# Altium PCB MS1005-DEMO-V2.PcbDoc
Units mil, origin at the board's own origin, x right, y up, seen from the top; angles counter-clockwise.
Board outline 2160 x 2405 mil, 2 copper layers (Top Layer, Bottom Layer); 54 components, 64 nets, 220 pads, 100 vias.
Unrouted connection lines stored in the file: 2.
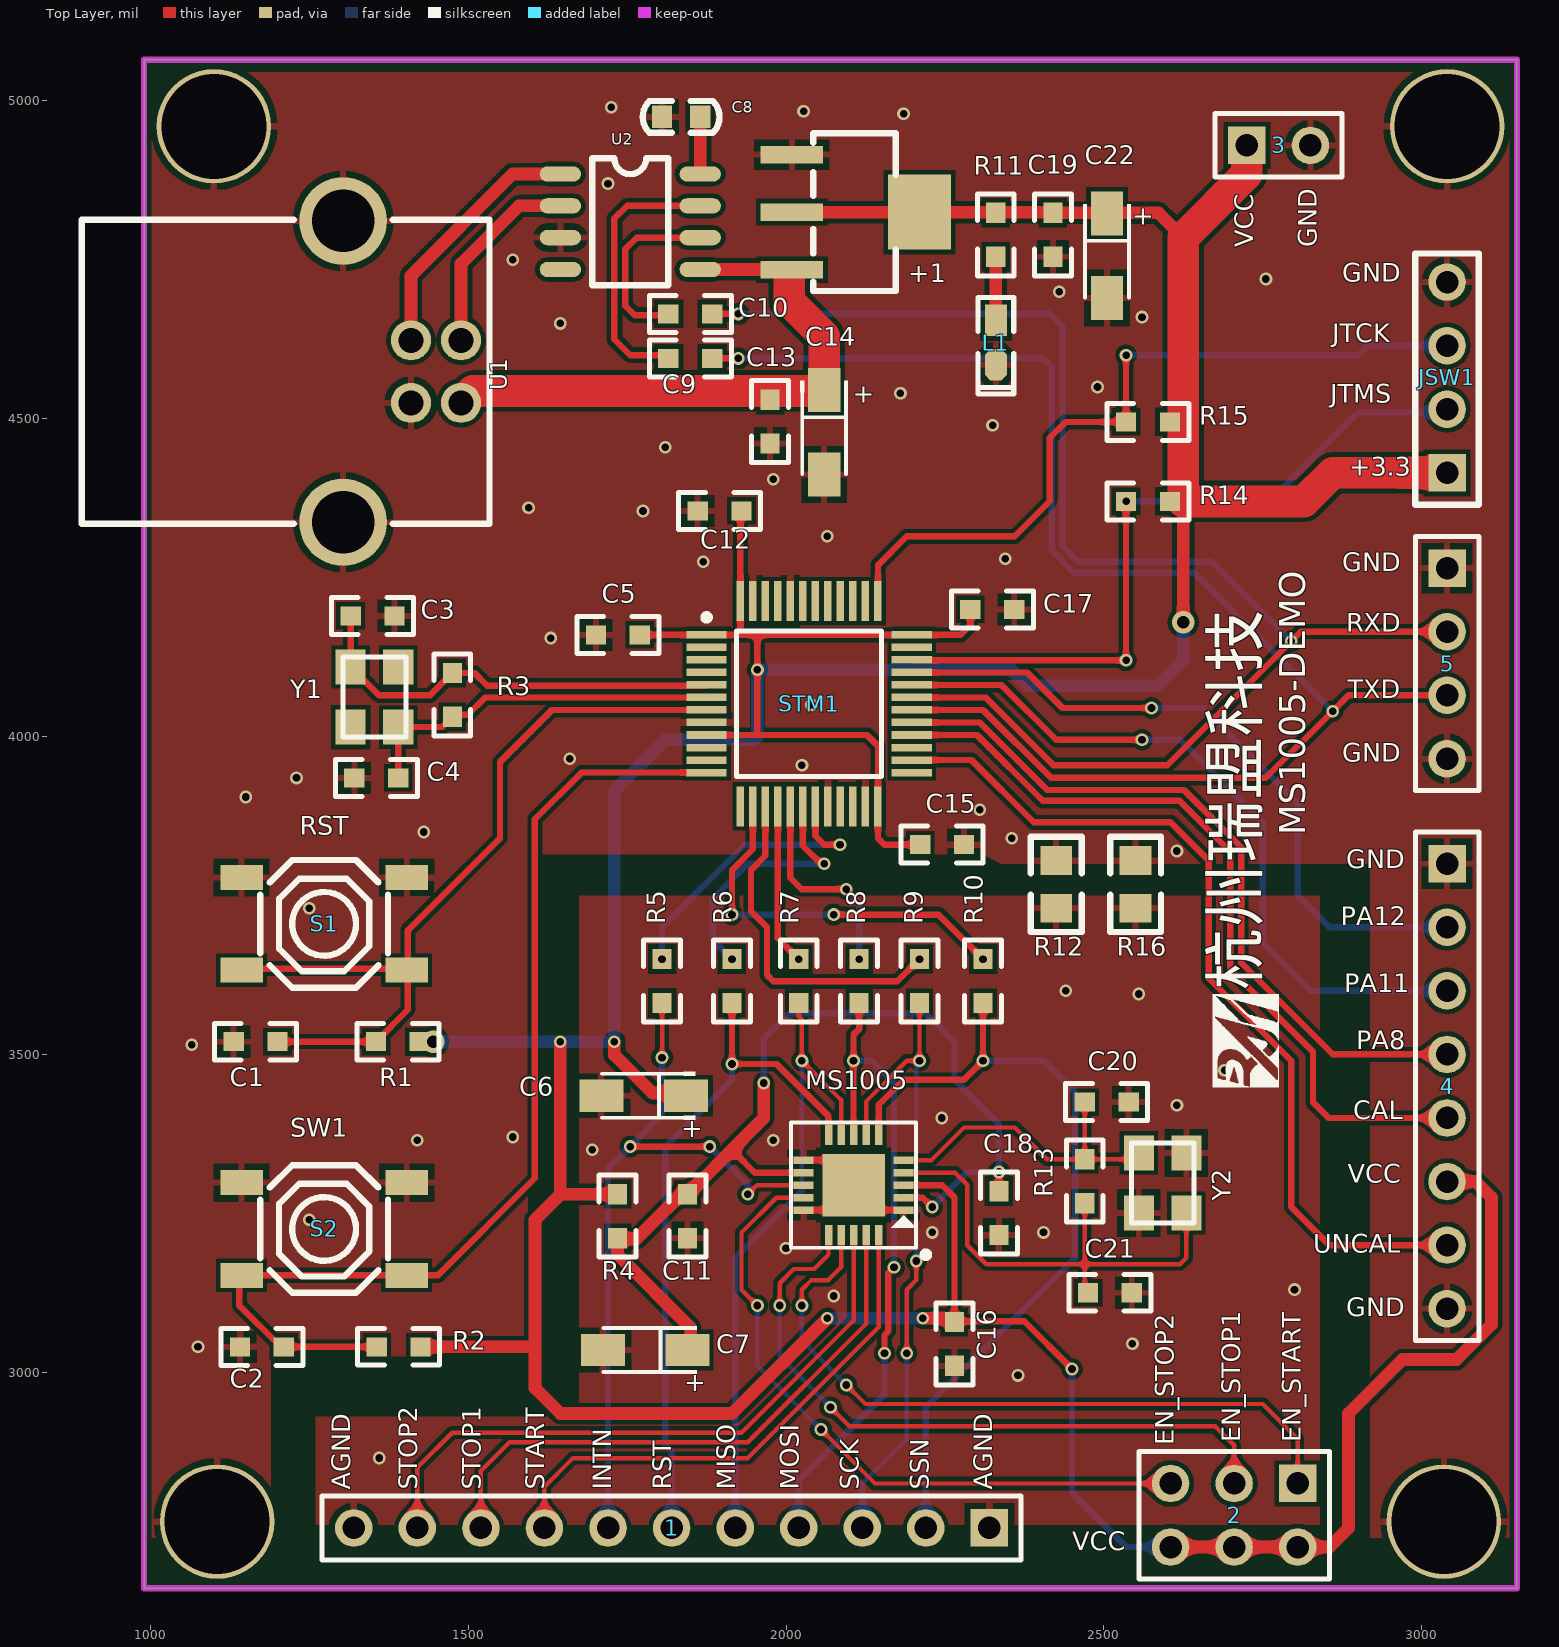
[diagram p0: Top Layer view]
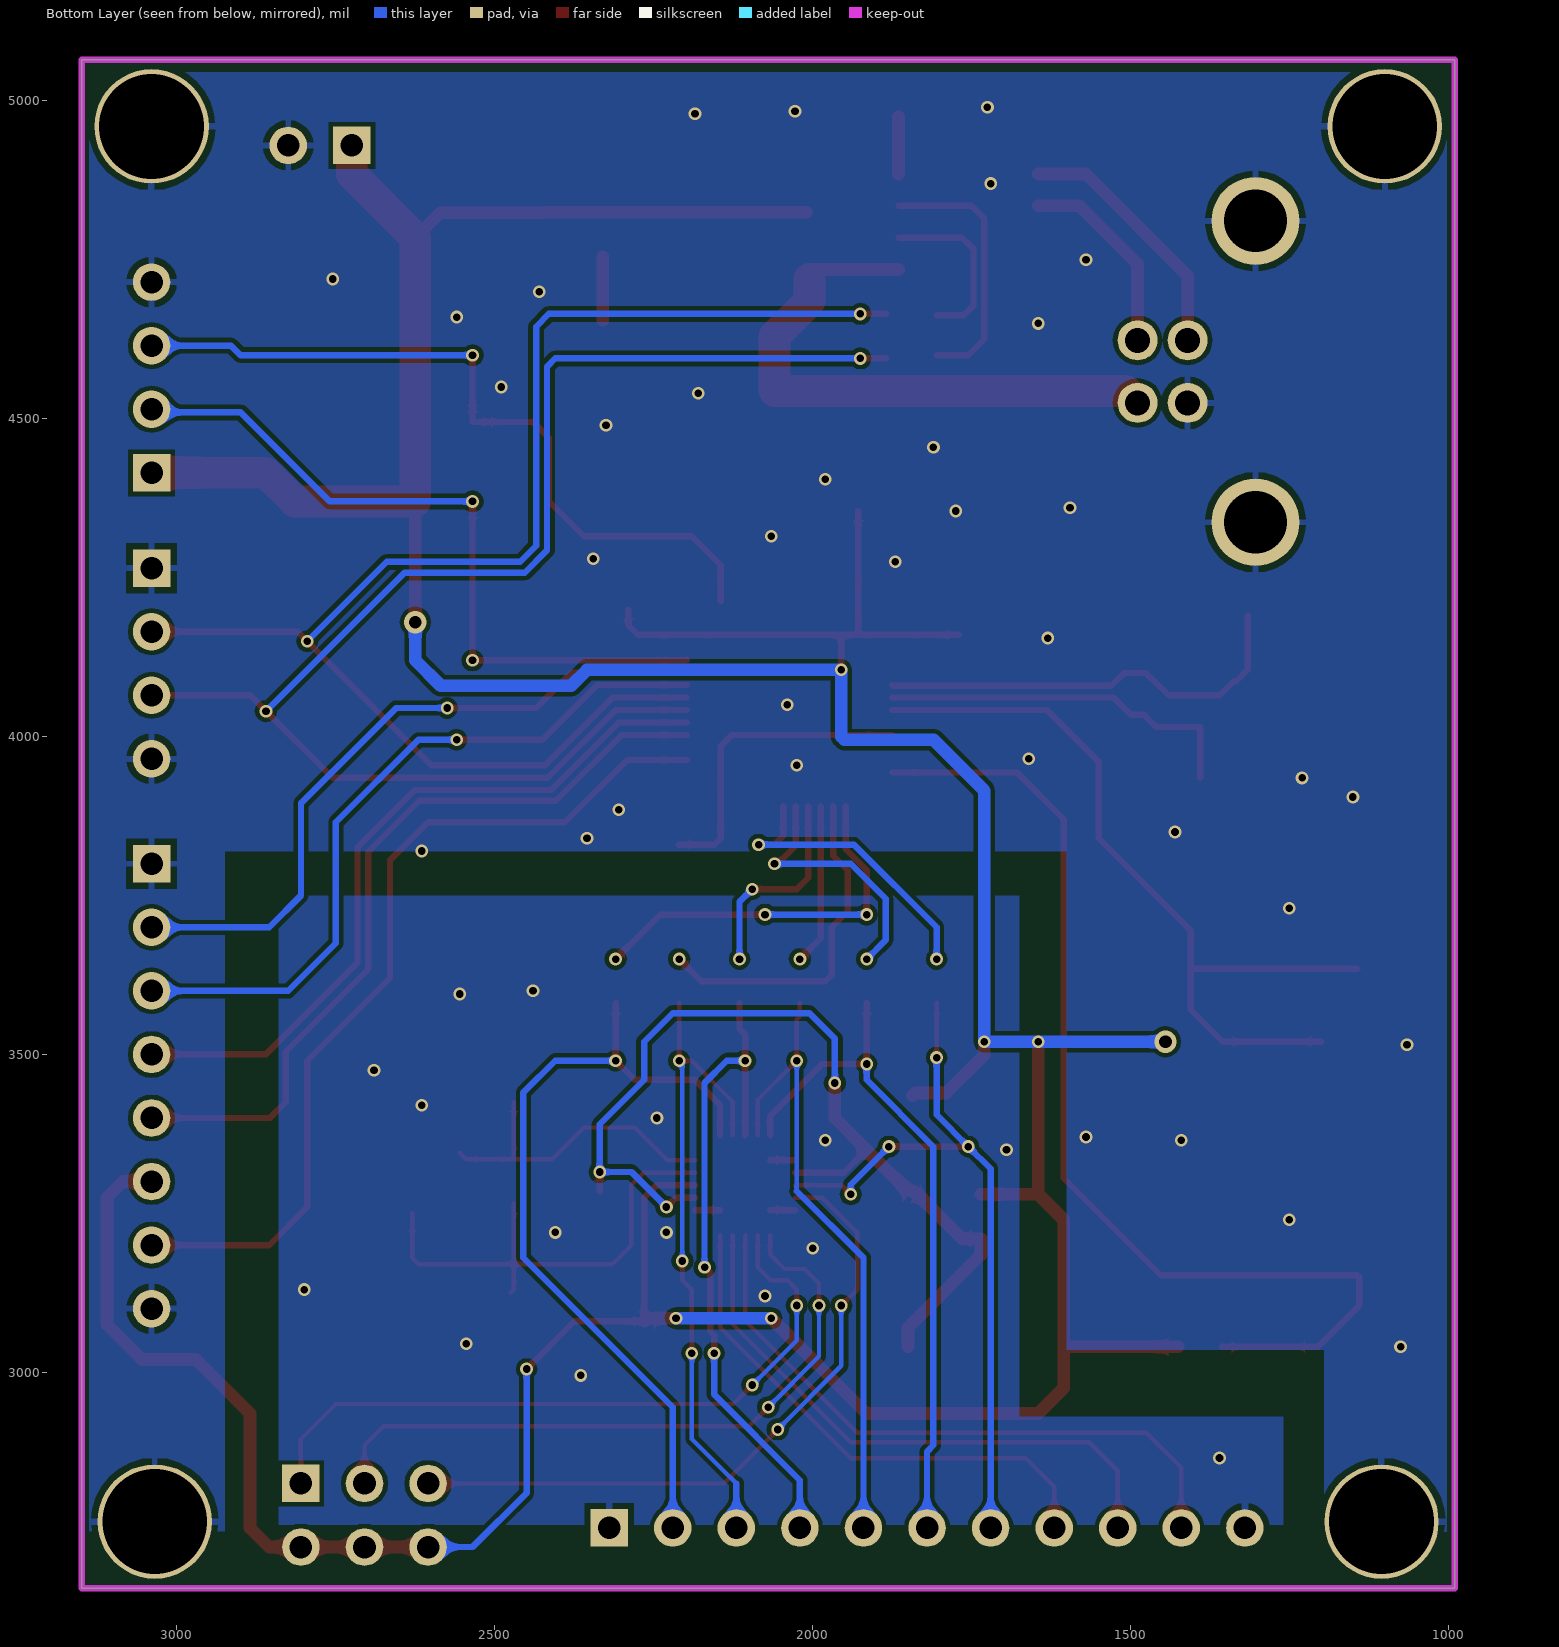
[diagram p1: Bottom Layer view, seen from below]

## Layer stack, top to bottom
Top Solder: solder mask 0.4, Solder Resist, Dk 3.5
Top Layer: signal copper 1.4
Dielectric1: dielectric 12.6, FR-4, Dk 4.8
Bottom Layer: signal copper 1.4
Bottom Solder: solder mask 0.4, Solder Resist, Dk 3.5

## Board outline
990,2660 990,5065 3150,5065 3150,2660

## Design rules (kind name [scope] priority, off if disabled: settings)
Clearance [All] p1: gap=7 ignorepadtopadclearanceinfootprint=FALSE except(0: Arc-Hole Track-Hole SMDPad-Hole THPad-Hole Via-Hole Fill-Hole Poly-Hole Region-Hole Text-Hole)
ComponentClearance [All] p1 off: gap=10 collisioncheckmode=3 verticalgap=10 showdistances=FALSE
HoleSize [All] p1: absolutevalues=TRUE maxlimit=200 minlimit=1 maxpercent=80.000 minpercent=20.000
HoleToHoleClearance [All] p1: gap=5 allowstackedmicrovias=TRUE
MinimumSolderMaskSliver [All] p1: minsoldermaskwidth=0
PlaneConnect [All] p1: pad.planeconnectstyle=Relief pad.reliefexpansion=20 pad.reliefentries=4 pad.reliefconductorwidth=10 pad.reliefairgap=10 via.planeconnectstyle=Direct via.reliefexpansion=20 via.reliefentries=4 via.reliefconductorwidth=10 via.reliefairgap=10
PolygonConnect [All] p1: thpad.connectstyle=Relief thpad.reliefconductorwidth=10 thpad.reliefentries=4 thpad.polygonreliefangle="90 Angle" thpad.airgapwidth=10 smdpad.connectstyle=Relief smdpad.reliefconductorwidth=10 smdpad.reliefentries=4 smdpad.polygonreliefangle="90 Angle" smdpad.airgapwidth=10 via.connectstyle=Direct via.reliefconductorwidth=10 via.reliefentries=4 via.polygonreliefangle="90 Angle" via.airgapwidth=10
RoutingVias [All] p1: holewidth=12 width=20 viastyle="Through Hole" minholewidth=12 minwidth=20 maxholewidth=28 maxwidth=50
SilkToSilkClearance [All] p1: silktosilkclearance=0
SilkToSolderMaskClearance [IsPad] p1: minsilkscreentomaskgap=0 clearancetoexposedcopper=TRUE
SolderMaskExpansion [All] p1: expansion=4
Width [All] p1: maxlimit=50 minlimit=5 preferedwidth=10
23 further rules are at their usual default settings.

## Classes and differential pairs
component class MS1003-DEMO: +1 C1 C3 C4 C5 C12 C13 C14 C16 C17 C19 C20 C21 C22 JSW1 L1 R2 R5 R6 R7 R8 R9 R11 R12 R13 R14 R15 R16 Y1

## Components (designator, comment, footprint, x,y, rotation, side; value= is the part's Value field where it differs from the comment)
1 "NC" HDR1X11 2320,2755 r180 top (schematic designator P10)
2 "NC" HDR2X3 2805,2825 r180 top (schematic designator P7)
3 "NC" HDR1X2 2725,4930 r0 top
4 "NC" HDR1X8 3040,3800 r270 top (schematic designator P5)
5 "NC" HDR1X4 3040,4265 r270 top (schematic designator P4)
+1 "ASM1117-3.3" 1117 1767,6404.55 r270 top (schematic designator U8)
C1 "104" R0603 1200,3520 r180 top (schematic designator C3)
C2 "104" R0603 1210,3039.88 r180 top (schematic designator C20)
C3 "20P" R0603 1384,4190 r180 top (schematic designator C19)
C4 "20P" R0603 1321,3935 r0 top (schematic designator C18)
C5 "104" R0603 1770,4160 r180 top (schematic designator C6)
C6 "C11366" 3216 1955.21,3472.64 r180 top (schematic designator C11)
C7 "C11366" 3216 1957.43,3072.64 r180 top (schematic designator C12)
C8 "0.1" 0603C 1805,4975 r0 top
C9 "0R" R0603 1884,4595 r180 top (schematic designator C38)
C10 "0R" R0603 1884,4665 r180 top (schematic designator C38)
C11 "104" R0603 1845,3280 r270 top (schematic designator C15)
C12 "104" R0603 1930,4355 r180 top (schematic designator C4)
C13 "104" R0603 1975,4461 r90 top (schematic designator C38)
C14 "C11366" 3216 2022.36,4657.43 r270 top (schematic designator C36)
C15 "104" R0603 2280,3830 r180 top (schematic designator C5)
C16 "104" R0603 2265,3010 r90 top (schematic designator C8)
C17 "104" R0603 2359,4200 r180 top (schematic designator C2)
C18 "104" R0603 2335,3216 r90 top (schematic designator C9)
C19 "104" R0603 2420,4755 r90 top (schematic designator C39)
C20 "15p" R0603 2539,3425 r180 top (schematic designator C7)
C21 "15p" R0603 2544,3125 r180 top (schematic designator C10)
C22 "C11366" 3216 2467.36,4935.21 r270 top (schematic designator C37)
JSW1 "NC" 4HEARD 3105,4815 r90 top
L1 "LED" "LED 0603R" 2330,4620 r270 top (schematic designator D2)
MS1005 "MS1005" QFN20-4X4 2185,3255 r180 top (schematic designator U1)
R1 "10K" R0603 1355,3520 r0 top (schematic designator R11)
R2 "4K7" R0603 1425,3040 r180 top (schematic designator R21)
R3 "1M" R0603 1475,4100 r270 top (schematic designator R4)
R4 "0" R0603 1735,3280 r270 top (schematic designator R1)
R5 "0" R0603 1805,3650 r270 top (schematic designator R39)
R6 "0" R0603 1915,3650 r270 top (schematic designator R38)
R7 "0" R0603 2020,3650 r270 top (schematic designator R37)
R8 "0" R0603 2115,3650 r270 top (schematic designator R36)
R9 "0" R0603 2210,3650 r270 top (schematic designator R35)
R10 "0" R0603 2310,3650 r270 top (schematic designator R34)
R11 "1K" R0603 2330,4824 r270 top (schematic designator R97)
R12 "0R" R0805 2425,3805 r270 top (schematic designator R27)
R13 "560k" R0603 2470,3335 r270 top (schematic designator R3)
R14 "10K" R0603 2535,4370 r0 top (schematic designator R10)
R15 "10K" R0603 2535,4495 r0 top (schematic designator R20)
R16 "0R" R0805 2550,3805 r270 top (schematic designator R28)
S1 "SW-SMD_4P-L5.1-W5.1-P3.70-LS6.5-TL-2" SW-SMD_4P-L5.1-W5.1-P3.70-LS6.5-TL-2 1273.38,3705.4 r0 top
S2 "SW-SMD_4P-L5.1-W5.1-P3.70-LS6.5-TL-2" SW-SMD_4P-L5.1-W5.1-P3.70-LS6.5-TL-2 1273.38,3225.4 r0 top
STM1 "STM32F103C8T6" LQFP48 1875,4160 r0 top (schematic designator U3)
U1 "USB-B-TH_USB-B10-BRW" USB-B-TH_USB-B10-BRW 1396.02,4574.21 r270 top
U2 "CH340N" SOP8-200 1645,4885 r0 top
Y1 "8M" 4M 1390,4015 r0 top (schematic designator CY1)
Y2 "8M" 4M 2629.8,3250.51 r0 top (schematic designator Y1)

## Footprints (in the part's own frame and the unit in brackets; to place one, negate y for a bottom-side part, rotate by r counter-clockwise, add the part's x,y. Pads: shape width x height; smd on the part's side, far side on the other; paste and mask are expansions set on the pad)
4HEARD [mm]
  rect 1.5x1.5 hole 0.9: 1(-10.16,1.651)
  round 1.5 hole 0.9: 2(-7.62,1.651) 3(-5.08,1.651) 4(-2.54,1.651)
  silkscreen extent -11.43,0.38 -1.4,2.92
4M [mm]
  rect 1.2x1.4 smd: 1(0,0) 2(0,2.4) 3(-1.9,2.4) 4(-1.9,0)
  silkscreen extent -2.2,-0.4 0.3,2.8
0603C [mil]
  rect 32x35 smd: 1(0,0) 2(60,0)
  silkscreen extent -30,-25 90,25
1117 [mm]
  rect 0.7x2.5 smd: 1(37.821,6.152) 2(40.121,6.152) 3(42.421,6.152)
  rect 3x2.5 smd: 2(40.121,11.252)
  silkscreen extent 36.97,7 43.27,10.3
3216 [mil]
  rect 69.19x51.02 smd paste+0 mask+2: 1(112.43,37.64) 2(245.21,37.64)
  silkscreen extent 98,0 245,75
HDR1X2 [mm] "Connector; Header; 2 Position"
  rect 1.5x1.5 hole 0.9: 1(0,0)
  round 1.5 hole 0.9: 2(2.54,0)
  silkscreen extent -1.27,-1.27 3.81,1.27
HDR1X4 [mm] "Connector; Header; 4 Position"
  rect 1.5x1.5 hole 0.9: 1(0,0)
  round 1.5 hole 0.9: 2(2.54,0) 3(5.08,0) 4(7.62,0)
  silkscreen extent -1.27,-1.27 8.89,1.27
HDR1X8 [mm] "Connector; Header; 8 Position"
  rect 1.5x1.5 hole 0.9: 1(0,0)
  round 1.5 hole 0.9: 2(2.54,0) 3(5.08,0) 4(7.62,0) 5(10.16,0) 6(12.7,0) 7(15.24,0) 8(17.78,0)
  silkscreen extent -1.27,-1.27 19.05,1.27
HDR1X11 [mm] "Connector; Header; 11 Position"
  rect 1.5x1.5 hole 0.9: 1(0,0)
  round 1.5 hole 0.9: 2(2.54,0) 3(5.08,0) 4(7.62,0) 5(10.16,0) 6(12.7,0) 7(15.24,0) 8(17.78,0) 9(20.32,0) 10(22.86,0) 11(25.4,0)
  silkscreen extent -1.27,-1.27 26.67,1.27
HDR2X3 [mm] "Connector; Header; 3x2 Position"
  rect 1.5x1.5 hole 0.9: 1(0,0)
  round 1.5 hole 0.9: 2(0,2.54) 3(2.54,0) 4(2.54,2.54) 5(5.08,0) 6(5.08,2.54)
  silkscreen extent -1.27,-1.27 6.35,3.81
"LED 0603R" [mil] "红色0603LED"
  rect 50x35 smd: 1(-35,0.26)
  oct 50x35 smd: 2(35,0.26)
  silkscreen extent -71,-28 81,28, body extent -31,-16 31,16, height 18
LQFP48 [mm]
  rect 1.6x0.3 smd: 1(0,0) 2(0,-0.5) 3(0,-1) 4(0,-1.5) 5(0,-2) 6(0,-2.5) 7(0,-3) 8(0,-3.5) 9(0,-4) 10(0,-4.5) 11(0,-5) 12(0,-5.5) 25(8.2,-5.5) 26(8.2,-5) 27(8.2,-4.5) 28(8.2,-4) 29(8.2,-3.5) 30(8.2,-3) 31(8.2,-2.5) 32(8.2,-2) 33(8.2,-1.5) 34(8.2,-1) 35(8.2,-0.5) 36(8.2,0)
  rect 0.3x1.6 smd: 13(1.35,-6.85) 14(1.85,-6.85) 15(2.35,-6.85) 16(2.85,-6.85) 17(3.35,-6.85) 18(3.85,-6.85) 19(4.35,-6.85) 20(4.85,-6.85) 21(5.35,-6.85) 22(5.85,-6.85) 23(6.35,-6.85) 24(6.85,-6.85) 37(6.85,1.35) 38(6.35,1.35) 39(5.85,1.35) 40(5.35,1.35) 41(4.85,1.35) 42(4.35,1.35) 43(3.85,1.35) 44(3.35,1.35) 45(2.85,1.35) 46(2.35,1.35) 47(1.85,1.35) 48(1.35,1.35)
  silkscreen extent -0.12,-5.65 7,0.82
QFN20-4X4 [mm]
  rect 2.5x2.5 smd mask+0: 0(2,-1)
  rect 0.8x0.3 smd mask+0: 1(0,0) 2(0,-0.5) 3(0,-1) 4(0,-1.5) 5(0,-2) 11(4,-2) 12(4,-1.5) 13(4,-1) 14(4,-0.5) 15(4,0)
  rect 0.3x0.8 smd mask+0: 6(1,-3) 7(1.5,-3) 8(2,-3) 9(2.5,-3) 10(3,-3) 16(3,1) 17(2.5,1) 18(2,1) 19(1.5,1) 20(1,1)
  silkscreen extent -0.5,-3.5 4.5,1.5
R0603 [mil]
  rect 32x30 smd mask+4: 1(0,0) 2(69,0)
  silkscreen extent -30,-29 99,29
R0805 [mil]
  rect 45x50 smd mask+4: 1(0,0)
  rect 45x50 smd: 2(75,0)
  silkscreen extent -38,-40 113,40
SOP8-200 [mil]
  oval 65x24 smd: 1(0,0) 2(0,-50) 3(0,-100) 4(0,-150) 5(220,-150) 6(220,-100) 7(220,-50) 8(220,0)
  silkscreen extent 50,-175 170,25
SW-SMD_4P-L5.1-W5.1-P3.70-LS6.5-TL-2 [mm]
  rect 1.7x1 smd paste+0 mask+0.051: 1(-3.3,1.85) 2(3.3,1.85) 3(-3.3,-1.85) 4(3.3,-1.85)
  silkscreen extent -2.55,-2.55 2.55,2.55
USB-B-TH_USB-B10-BRW [mm]
  round 1.6 hole 1: 1(1.25,2.355) 2(-1.25,2.355) 3(-1.25,0.355) 4(1.25,0.355)
  round 3.5 hole 2.5: 5(-6.02,-2.355) 6(6.02,-2.355)
  silkscreen extent -6.08,-12.81 6.07,3.49

## Part data
1: library part "Header 11"
2: library part "Header 3X2"
4: library part "Header 8"
5: library part "Header 4"
+1: library part REG1117-3.3, "800mA and 1A Low Dropout Positive Regulator 2.85V, 3.3V, 5V, and Adjustable"
C1 C2 C3 C4 C5 C12 C15 C17: library part C_1
C6 C7: library part Cap
C9 C10 C11 C13 C16 C18 C19 C20 C21: library part Cap, "Capacitor"
C14 C22: library part "Cap Pol2"
JSW1: library part SW_LINK
MS1005: library part AD7689
R1 R2 R3 R14 R15: library part R
R4 R5 R6 R7 R8 R9 R10 R13: library part Res2, "Resistor"
R11 R12 R16: library part RES2
Y1: library part CRYSTAL
Y2: library part XTAL, "Crystal Oscillator"

## Free pads (board coordinates)
  round 180 hole 165: 56(1100,4960) 56(1105,2765) 56(3035,2765) 56(3040,4960)

## Via types
v1: diameter 20, hole 12, Top Layer to Bottom Layer, 98 vias
v2: diameter 35, hole 20, Top Layer to Bottom Layer, 2 vias

## Nets (pads, with @x,y where several pads share a name; then routed paths per layer and width w, separated by ;. In a path a pad name is that pad's centre, name@x,y a point inside that pad or via, vN(x,y) a via of type N, cw(c..) or ccw(c..) an arc to the next point about the centre after c; other vN are vias at no path point)
11111: 
+3.3: 2.2 2.4 2.6 3.1 4.6 +1.2 C5.1 C6.1 C12.1 C15.2 C16.2 C17.2 C19.2 C22.1 JSW1.1 MS1005.3 R1.2 R2.1 R4.1 R11.1 R14.2 R15.2 STM1.1 STM1.9 STM1.24 STM1.36 STM1.48 | length 8702
  Top Layer w10: C5.1 STM1.1 1921.58,4160 ; STM1.9 1957.48,4002.52 ; C12.1@1928.15,4355 STM1.48 1928.15,4166.57 1921.58,4160 ; MS1005.3 2245.63,3294.37 2265,3275 2265,3080 2375,3080 v1(2450,3005) ; C15.2 2155,3830 2144.69,3840.31 STM1.24 2144.69,3985.31 2127.48,4002.52 1957.48,4002.52 ; C17.2 2290,4175 2275,4160 STM1.36 1955,4160 ; 1921.58,4160 1955,4160 ; 1955,4160 v1(1955,4105) 1955,4005 1957.48,4002.52
  Top Layer w20: R2.1 1600,3040 1605,3045 ; 1645,3285 v1(1645,3520) ; v1(1730,3520) 1730,3499.15 1789.9,3439.25 1838.53,3439.25 C6.1 ; R4.1 1645,3280 1605,3240 1605,3045 ; +1.2@2009.21,4825 2210,4825 2419,4825 C19.2 2586,4824 2625,4785 ; v1(2065,3085) 1915,2935 1645,2935 1605,2975 1605,3045 ; v1(2215,3085) 2260,3085 C16.2@2265,3080 ; 2.6 2.4 2.2 2855,2725 2885,2755 2885,2935 2970,3020 3055,3020 3110,3075 3110,3275 3085,3300 4.6 ; v2(2625,4180) 2625,4370
  Top Layer w50: 3.1 2725,4885 2625,4785 2625,4370 2815,4370 2860,4415 JSW1.1
  Bottom Layer w10: v1(2450,3005) 2450,2810 2535,2725 2.6
  Bottom Layer w20: v2(1445,3520) v1(1645,3520) v1(1730,3520) 1730,3915 1810,3995 1950,3995 ; 1955,4000 v1(1955,4105) 2355,4105 2380,4080 2585,4080 2625,4120 v2(2625,4180) ; v1(2065,3085) v1(2215,3085)
+5: +1.3 C13.2 C14.1 U1.1 U2.5 | length 922.2
  Top Layer w20: U2.5 2008.66,4735 +1.3
  Top Layer w50: U1.1 1507.52,4543.78 2059.49,4543.78 2060,4544.29 C14.1 2060,4630 2005,4685 2005,4720
AGND: 1.1 1.11 C6.2 C7.2 C11.2 C16.1 C18.1 C20.1 C21.1 MS1005.0 MS1005.1 MS1005.11 MS1005.15 R12.2 R16.2 Y2.2 Y2.4 | length 118.1
  Top Layer w10: MS1005.15 MS1005.0@2066.89,3255 ; MS1005.11 MS1005.0@2066.89,3333.74 ; MS1005.0@2145.63,3255 MS1005.1
  other v1: 1360,2865 2365,2995 2545,3045 2075,3120 2800,3130 2000,3195 2230,3220 2405,3220 1695,3350 1980,3365 2245,3400 2615,3420 2690,3475 2555,3595 2440,3600
DM: U1.2 U2.2 | length 314.4
  Top Layer w20: U1.2 1488.74,4743.74 1580,4835 U2.2
DP: U1.3 U2.1 | length 402.8
  Top Layer w20: U1.3 1410,4725 1570,4885 U2.1
EN_START: 2.1 MS1005.17 | length 1120.9
  Top Layer w7: v1(2025,3105) 2025,3130 2040,3145 2066.57,3145 2086.57,3165 MS1005.17 ; v1(2095,2980) 2125,2950 2750,2950 2805,2895 2.1
  Bottom Layer w7: v1(2025,3105) 2025,3050 v1(2095,2980)
EN_STOP1: 2.3 MS1005.16 | length 1074.1
  Top Layer w7: v1(1990,3105) 1990,3140 2012.38,3162.38 2044.27,3162.38 2066.89,3185 MS1005.16 ; v1(2070,2945) 2100,2915 2675,2915 2705,2885 2.3
  Bottom Layer w7: v1(1990,3105) 1990,3025 v1(2070,2945)
EN_STOP2: 2.5 MS1005.14 | length 1067.2
  Top Layer w7: v1(1955,3105) 1930,3130 1930,3220 1984.68,3274.68 MS1005.14 ; v1(2055,2910) 2140,2825 2.5
  Bottom Layer w7: v1(1955,3105) 1955,3010 v1(2055,2910)
GND: 3.2 4.1 4.8 5.1 5.4 +1.1 C1.2 C2.2 C3.1 C4.1 C5.2 C8.1 C12.2 C13.1 C14.2 C15.1 C17.1 C19.1 C22.2 JSW1.4 L1.2 pad.56 R12.1 R16.1 S1.1 S1.2 S2.1 S2.2 STM1.8 STM1.20 STM1.23 STM1.44 STM1.47 U1.4 U1.5 U1.6 U2.3
  other v1: 1075,3040 1250,3240 1420,3365 1570,3370 1065,3515 1250,3730 2615,3820 2355,3840 1430,3850 2305,3885 1150,3905 1230,3935 2025,3955 1660,3965 2040,4050 1630,4155 1870,4275 2345,4280 2065,4315 1775,4355 1595,4360 1980,4405 1810,4455 2325,4490 2180,4540 2490,4550 1645,4650 2560,4660 2430,4700 2755,4720 1570,4750 1720,4870 2185,4980 2027.68,4984.02 1725,4990
JTCK: JSW1.3 R15.1 STM1.37 | length 1215
  Top Layer w10: STM1.37 2144.69,4269.69 2190,4315 2360,4315 2415,4370 2415,4470 2440,4495 R15.1 v1(2535,4600)
  Bottom Layer w10: v1(2535,4600) 2900,4600 2915,4615 JSW1.3
JTDI: STM1.38
JTDO: STM1.39
JTMS: JSW1.2 R14.1 STM1.34 | length 1152.5
  Top Layer w10: STM1.34 2198.47,4120 v1(2535,4120) v1(2535,4370)
  Bottom Layer w10: v1(2535,4370) 2760,4370 2900,4510 3035,4510 JSW1.2
MS1003-INTN: R5.1 STM1.19 | length 474.9
  Top Layer w10: STM1.19 2046.26,3843.74 2060,3830 v1(2085,3830)
  Bottom Layer w10: v1(1805,3650) 1805,3700 1935,3830 v1(2085,3830)
MS1003-MISO: R7.1 STM1.16 | length 253.9
  Top Layer w10: STM1.16 1987.21,3682.79 v1(2020,3650)
MS1003-MOSI: R8.1 STM1.17 | length 326.1
  Top Layer w10: STM1.17 2006.89,3778.11 2025,3760 v1(2095,3760)
  Bottom Layer w10: v1(2095,3760) 2115,3740 v1(2115,3650)
MS1003-RST: R6.1 STM1.18 | length 415.2
  Top Layer w7: STM1.18@2024.5,3888.24 STM1.18 ; v1@2055,3800 v1(2060,3800)
  Top Layer w10: STM1.18 2026.58,3828.42 v1@2055,3800
  Bottom Layer w10: v1(1915,3650) 1885,3680 1885,3745 1940,3800 v1(2060,3800)
MS1003-SCK: R9.1 STM1.15 | length 543.6
  Top Layer w10: STM1.15 1967.52,3812.52 1945,3790 1945,3725 1970,3700 1970,3625 1980,3615 2175,3615 v1(2210,3650)
MS1003-SSN: R10.1 STM1.14 | length 607.9
  Top Layer w10: v1(1915,3720) 1915,3790 1947.84,3822.84 STM1.14 ; v1(2075,3720) 2240,3720 v1(2310,3650)
  Bottom Layer w10: v1(1915,3720) v1(2075,3720)
MS1003-START: 1.8 MS1005.20 | length 839.4
  Top Layer w7: 1.8 1620,2820 1665,2865 1940,2865 2145.63,3070.63 MS1005.20
MS1003-STOP1: 1.9 MS1005.19 | length 931.3
  Top Layer w7: 1.9 1520,2845 1565,2890 1940,2890 2125.94,3075.94 MS1005.19
MS1003-STOP2: 1.10 MS1005.18 | length 1011.4
  Top Layer w7: 1.10 1420,2850 1475,2905 1930,2905 2106.26,3081.26 MS1005.18
NetC7_2: C20.2 MS1005.5 R13.1 Y2.3 | length 506.1
  Top Layer w7: MS1005.5 2228.74,3333.74 2280,3385 2360,3385 2410,3335 R13.1 ; C20.2 R13.1 ; Y2.3 2545,3335 R13.1
NetC10_2: C21.2 MS1005.4 R13.2 Y2.1 | length 778
  Top Layer w7: MS1005.4 2265.94,3314.06 2285,3295 2285,3200 2315,3170 2470,3170 ; R13.2 2470,3170 ; C21.2 2470,3130 2470,3170 ; Y2.1 2629.8,3179.8 2620,3170 2470,3170
NetD10_1: L1.1 R11.2 | length 100.1
  Top Layer w20: R11.2 2330,4655.25 L1.1
NetR34_2: 1.2 MS1005.6 R10.2 | length 1279.7
  Top Layer w10: MS1005.6 2145.63,3420.63 2185,3460 2280,3460 v1(2310,3490) R10.2
  Bottom Layer w10: 1.2 2220,2945 2455,3180 2455,3440 2405,3490 v1(2310,3490)
NetR35_2: 1.3 MS1005.7 R9.2 | length 1052.7
  Top Layer w7: MS1005.7 2125.94,3425.94 2190,3490 v1(2210,3490) R9.2 2210,3555 ; v1(2190,3030) 2190,3130 2205,3145 v1(2205,3175)
  Bottom Layer w7: 2120,2825 2190,2895 v1(2190,3030) ; v1(2205,3175) 2205,3485 v1(2210,3490)
  Bottom Layer w10: 1.3 2120,2825
NetR36_2: 1.4 MS1005.8 R8.2 | length 1048.1
  Top Layer w10: MS1005.8 v1(2106.26,3490) 2106.26,3531.26 2115,3540 R8.2 ; v1(2155,3030) 2155,3058.08 2161.13,3064.21 2161.13,3156.13 v1(2170,3165)
  Bottom Layer w10: 1.4 2020,2830 2155,2965 v1(2155,3030) ; v1@2110,3490 2135,3490 2170,3455 v1(2170,3165)
NetR37_2: 1.5 MS1005.9 R7.2 | length 1014
  Top Layer w7: R7.2 2020,3560 2025,3555 v1(2025,3490) 2086.57,3428.43 MS1005.9
  Bottom Layer w7: 2025,3285 v1(2025,3490)
  Bottom Layer w10: 1.5 1920,3180 2025,3285
NetR38_2: 1.6 MS1005.10 R6.2 | length 1089.4
  Top Layer w10: R6.2 v1(1915,3485) 1985,3485 2066.89,3403.11 MS1005.10
  Bottom Layer w10: 1.6 1820,2875 1810,2885 1810,3355 1915,3460 v1(1915,3485)
NetR39_2: 1.7 MS1005.13 R5.2 | length 1179.5
  Top Layer w7: v1(1805,3495) R5.2 ; v1(1940,3280) 1954.37,3294.37 MS1005.13
  Top Layer w10: v1(1755,3355) v1(1880,3355)
  Bottom Layer w10: 1.7 1720,3320 v1(1755,3355) 1805,3405 v1(1805,3495) ; v1(1880,3355) 1940,3295 v1(1940,3280)
NetU7_8: C8.2 U2.8 | length 90
  Top Layer w20: U2.8 C8.2
NJTRST: STM1.40
NRST: C1.1 R1.1 S1.3 S1.4 STM1.7 | length 1293.8
  Top Layer w10: S1.3@1143.46,3635 1405,3635 1405,3695 1550,3840 1550,3960 1631.89,4041.89 STM1.7 ; C1.1 R1.1 1405,3570 S1.4@1405,3632.56
OSC_IN: C3.2 R3.1 STM1.5 Y1.3 | length 685
  Top Layer w10: C3.2 1315.2,4189.8 Y1.3 1315.2,4105.55 1333.82,4086.93 1337.76,4086.93 1359.68,4065 1440,4065 1464,4089 1465,4089 1475,4099 R3.1 1510,4100 1530,4080 1873.74,4080 STM1.5
OSC_OUT: C4.2 R3.2 STM1.6 Y1.1 | length 584.9
  Top Layer w10: C4.2 Y1.1 1459,4015 1464,4020 1465,4020 1475,4030 R3.2 1478.14,4034.14 1499.14,4034.14 1526.58,4061.58 STM1.6
PA0: STM1.10
PA1: STM1.11
PA2: C2.1 R2.2 S2.3 S2.4 STM1.12 | length 1678
  Top Layer w10: S2.3@1140,3150 1140,3105 1205,3040 R2.2 ; S2.3 S2.4 1452.56,3152.56 1605,3305 1605,3870 1678.47,3943.47 STM1.12
PA8: 4.4 STM1.29 | length 1165.2
  Top Layer w10: STM1.29 2304.92,4022.21 2411.12,3916 2626.12,3916 2716,3826.12 2716,3644 2860,3500 4.4
PA11: 4.3 STM1.32 | length 1152.8
  Top Layer w10: STM1.32 2338.74,4081.26 2425,3995 v1(2560,3995)
  Bottom Layer w10: v1(2560,3995) 2620,3995 2750,3865 2750,3675 2825,3600 4.3
PA12: 4.2 STM1.33 | length 1088.2
  Top Layer w10: STM1.33 2379.05,4100.95 2435,4045 v1@2570,4045
  Bottom Layer w10: v1(2575,4045) 2655,4045 2805,3895 2805,3750 2855,3700 4.2
PB0: STM1.13
PB5: STM1.41
PB6: STM1.42
PB7: STM1.43
PB8: STM1.45
PB9: STM1.46
PB10: STM1.21
PB11: STM1.22
PB12: STM1.25
PB13: 4.7 STM1.26 | length 1401.4
  Top Layer w10: STM1.26 2291.85,3963.15 2390,3865 2605,3865 2665,3805 2665,3620 2795,3490 2795,3260 2855,3200 4.7
PB14: STM1.27
PB15: 4.5 STM1.28 | length 1246.4
  Top Layer w10: STM1.28 2300.56,4002.52 2404.08,3899 2619.08,3899 2699,3819.08 2699,3634.08 2829,3504.08 2829,3425 2854,3400 4.5
PC13: STM1.2
PC14: STM1.3
PC15: STM1.4
UART_R2T: 
UART_T2R: 
USART1_RX: 5.2 C10.1 C10.2 STM1.31 U2.6 | length 2578.4
  Top Layer w10: C10.2@1805,4663 1762,4663 1747,4678 1747,4767 1765,4785 U2.6 ; C10.1 v1(1925,4665) ; STM1.31 2314.36,4061.58 2420.93,3955 2600,3955 2810,4165 5.2
  Bottom Layer w10: v1(1925,4665) 2415,4665 2435,4645 2435,4300 2460,4275 2670,4275 v1(2795,4150)
USART1_TX: 5.3 C9.1 C9.2 STM1.30 U2.7 | length 2734.1
  Top Layer w10: C9.2@1805,4600 1755,4600 1730,4625 1730,4815 1750,4835 U2.7 ; C9.1 v1(1925,4595) ; STM1.30 2310,4041.89 2416.89,3935 2755,3935 v1(2860,4040) 2885,4065 5.3
  Bottom Layer w10: v1(1925,4595) 2405,4595 2418,4582 2418,4292.96 2452.96,4258 2642,4258 v1(2860,4040)
V_USB: 
VDD: C7.1 C11.1 C18.2 MS1005.2 MS1005.12 R4.2 | length 1559.8
  Top Layer w10: 1915,3350 1950.94,3314.06 MS1005.12 ; MS1005.2 2215.32,3274.68 v1(2230,3260) ; C18.2 v1(2335,3315)
  Top Layer w20: C7.1@1850,3040 1850,3070 1735,3185 1735,3210 1765,3210 1835,3280 1842.45,3284.36 1859.06,3294.06 1915,3350 1965,3400 v1(1965,3455)
  Bottom Layer w10: v1@1965,3450 v1(1965,3455) 1965,3525 2005,3565 2220,3565 2265,3520 2265,3460 2335,3390 v1(2335,3315) 2285,3315 v1(2230,3260)
pads on no net: STM1.35 U2.4 Y1.2 Y1.4

## Polygon pours and split planes (outlines as drawn)
GND on Bottom Layer "Top Layer-No Net" (solid, pour order 1003): 1000.02,5045 3150,5045 3150,2750 2925,2750 2925,3820 2695,3820 1600,3820 1600,3735 1600,3035 1195,3035 1195,2750 1193.81,2748.81 998.81,2748.81
AGND on Bottom Layer "Top Layer-No Net" (solid, pour order 1000): 1260,2785 1260,2930 1675,2930 1675,3040 1675,3750 2840,3750 2840,2760 1260,2760
GND on Top Layer "Top Layer-No Net" (solid, pour order 1002): 994,5045 1375,5045 1915,5045 2675,5045 3144,5045 3144,4805 3144,2740 2919,2740 2919,3065 2919,3800 2339,3800 2309,3815 2304,3815 2104,3815 1594,3815 1594,3445 1594,3030 1589,3025 1224,3025 1189,3025 1189,2740 994,2740 992.81,2738.81
AGND on Top Layer "Top Layer-No Net" (solid, pour order 1001): 1260,2785 1260,2930 1430,2930 1675,2930 1675,3750 2840,3750 2840,2760 1260,2760 1260,2785 1255,2785

## Keep-outs
Keep-Out Layer:
  the board outline again, w10

## Silkscreen, mask and mechanical layers (free items; w line width, h text height)
Top Overlay:
  drawing of 1069 lines, arcs and shapes, not listed
  text "+" at 2545,4805 h30
  text "VCC" at 2745,4770 h50 r90
  text "GND" at 2845,4770 h50 r90
  text "GND" at 2875,4705 h50
  text "JTCK" at 2859.11,4610 h50
  text "+" at 2105,4525 h30
  text "JTMS" at 2856.38,4515 h50
  text "+3.3" at 2885.76,4400 h50
  text "GND" at 2875,4250 h50
  text "RXD" at 2881.1,4155 h50
  text "TXD" at 2883.59,4050 h50
  text "GND" at 2875,3950 h50
  text "MS1005-DEMO" at 2830,3845 h70 r90
  text "RST" at 1235,3835 h50
  text "GND" at 2881.34,3782.76 h50
  text "PA12" at 2872.38,3692.76 h50
  text "杭州瑞盟科技" at 2765,3600 h125.24 r90
  text "PA11" at 2878.24,3587.76 h50
  text "PA8" at 2896.86,3497.76 h50
  text "CAL" at 2892.75,3387.76 h50
  text "+" at 1835,3370 h30
  text "SW1" at 1220,3360 h50
  text "VCC" at 2883.51,3287.76 h50
  text "UNCAL" at 2829.55,3177.76 h50
  text "GND" at 2881.34,3077.76 h50
  text "+" at 1840,2970 h30
  text "EN_STOP1" at 2725,2890 h50 r90
  text "EN_START" at 2820,2890 h50 r90
  text "EN_STOP2" at 2620,2885 h50 r90
  text "AGND" at 1325,2815 h50 r90
  text "STOP2" at 1430,2815 h50 r90
  text "STOP1" at 1530,2815 h50 r90
  text "START" at 1630,2815 h50 r90
  text "INTN" at 1735,2815 h50 r90
  text "RST" at 1830,2815 h50 r90
  text "MISO" at 1930,2815 h50 r90
  text "MOSI" at 2030,2815 h50 r90
  text "SCK" at 2125,2815 h50 r90
  text "SSN" at 2235,2815 h50 r90
  text "AGND" at 2335,2815 h50 r90
  text "VCC" at 2450,2710 h50